# EAGLE board ESPSwitchBoard (EAGLE 7.3.0)
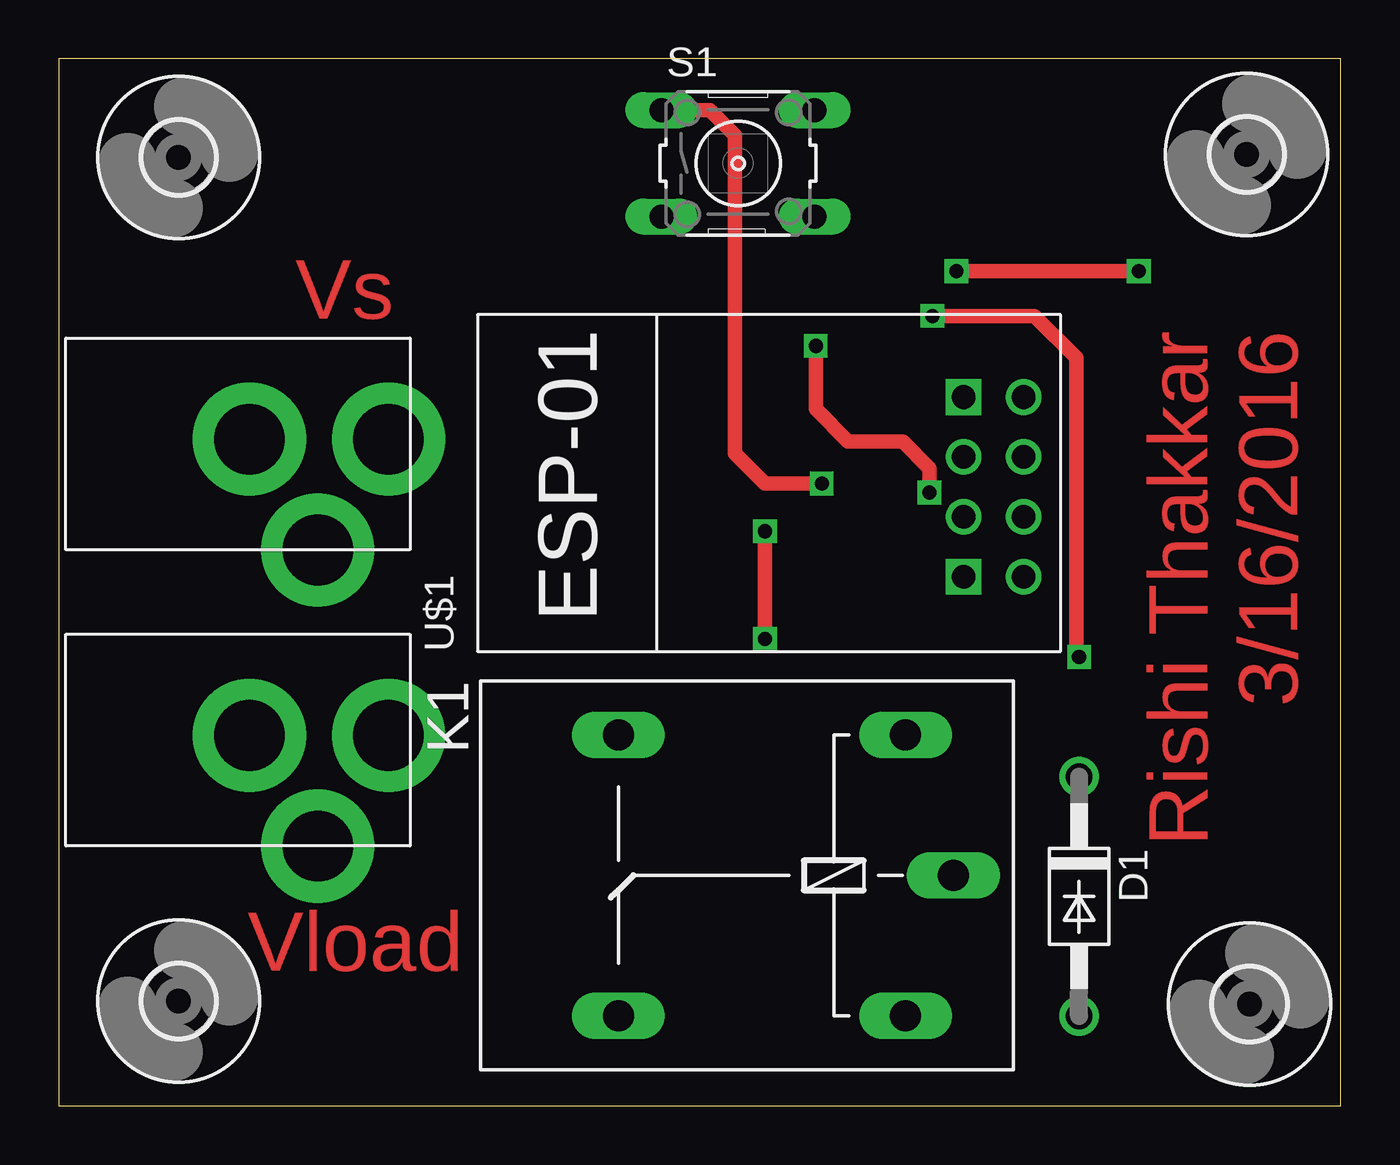
[diagram p0: board, top side]
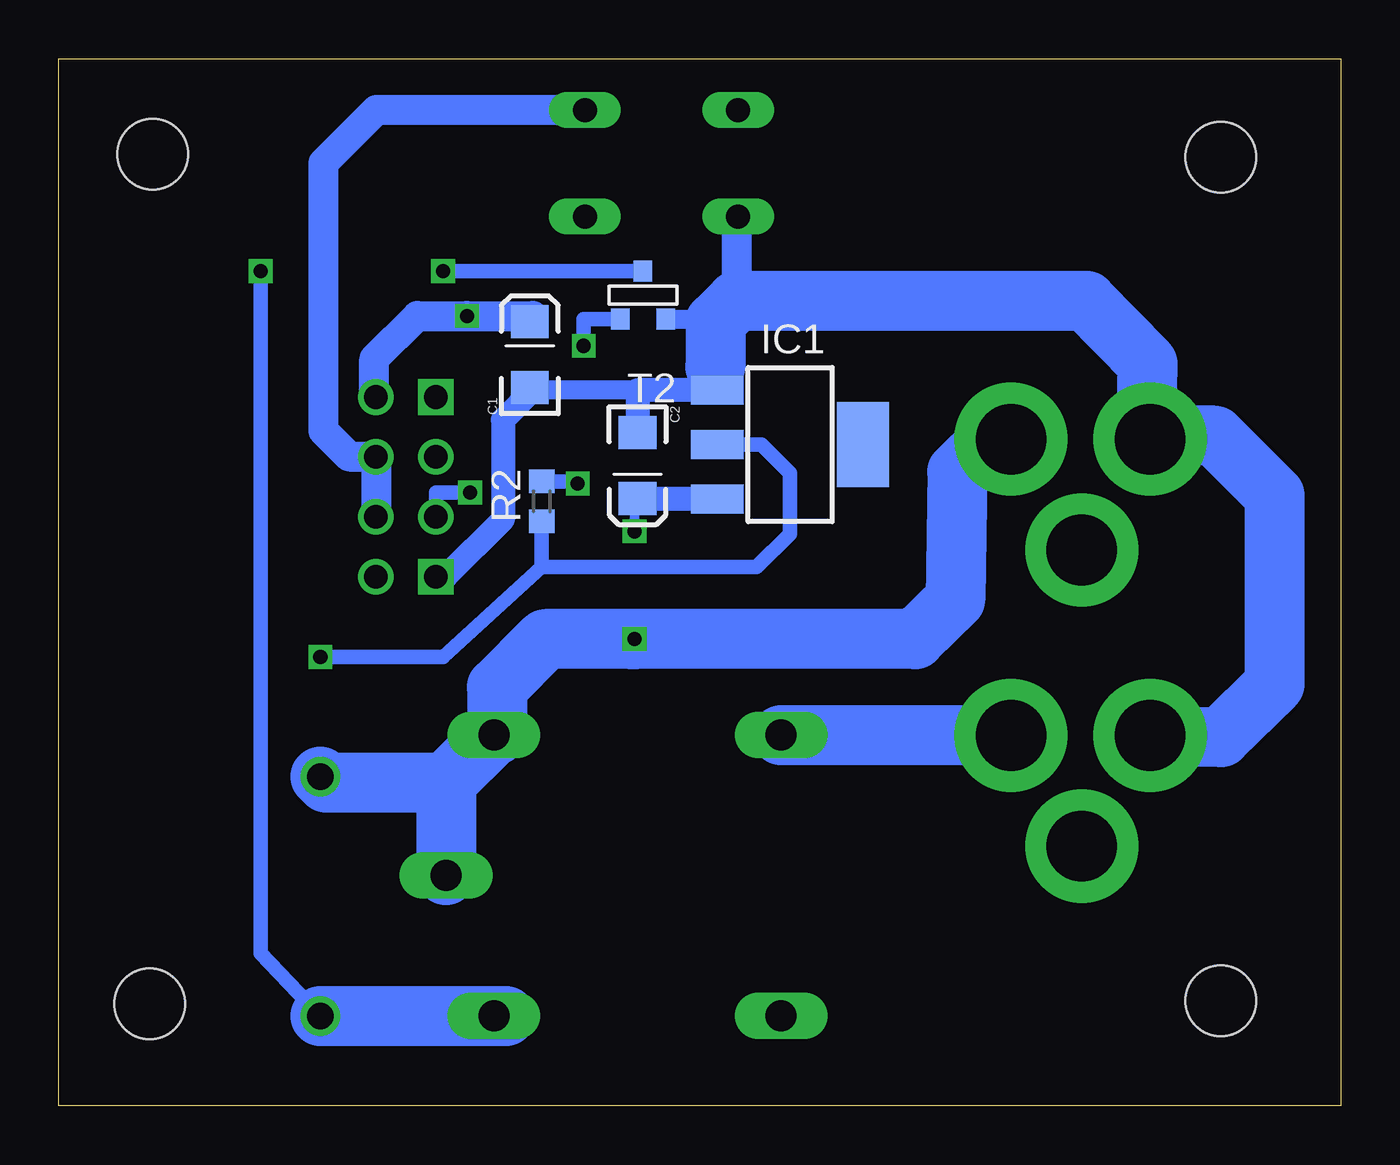
[diagram p1: board, bottom side, seen from below]

Size 54.41 x 44.44 mm. Coordinates in mm from the lower left corner, seen from the top.
Outline: 0,0 54.41,0 54.41,44.44 0,44.44 0,0
Copper layers (1*16): Top 0.035mm / dielectric 1.5mm / Bottom 0.035mm
Design rules "default": minimum track width 10mil, minimum drill 24mil, track to track 8mil, track to pad 8mil, pad to pad 8mil, via to via 8mil, smd to smd 8mil, copper to edge 40mil, drill to drill 8mil, minimum pad ring 10mil, minimum via ring 8mil, stop-mask expansion 4mil, vias tented up to drill 0mil, thermal gap 10mil

## Footprints (pad centres in the part's own frame; a part is rotated, then mirrored left to right if it is on the bottom)
EIA3216 = smd 1.4 x 1.6: A 1.4,0; C -1.4,0
DO41-10 = drill 1.118: A 5.08,0; C -5.08,0
SOT223 = smd 1.219 x 2.235: 1 -2.311,-3.099; 2 0,-3.099; 3 2.311,-3.099 | smd 3.6 x 2.2: TAB 0,3.099
G5LE = drill 1.321 long: 1 -7.493,-5.969; 2 -7.493,5.969; O 4.699,5.969; P -9.525,0; S 4.699,-5.969
R0603 = smd 1 x 1.1: 1 -0.85,0; 2 0.85,0
B3F-10XX = drill 1.016 long: 1 -3.251,2.261; 2 3.251,2.261; 3 -3.251,-2.261; 4 3.251,-2.261
SOT-23 = smd 0.787 x 0.889: 1 0.025,-1.016; 2 -0.94,1.016; 3 0.991,1.016
ESP01 = drill 1: CH_PD -1.285,-8.178; GPIO0 1.255,-5.638; GPIO2 -1.285,-5.638; RST 1.255,-8.178; TX -3.825,-8.178; VCC 3.795,-8.178 | drill 1 square: GND -3.825,-5.638; RX 3.795,-5.638
3,0 = hole 3: 0,0
PJ-102A = drill 3 pad 4.8: RING 0.1,-3.39; RING_SW -4.6,-6.29; TIP 0.1,-9.29

## Placement (x,y rotation side)
C1  10uF  [EIA3216]  34.42,31.88 90 bottom
C2  10uF  [EIA3216]  29.84,27.18 270 bottom
D1  1N4004  [DO41-10]  43.31,8.89 270 top
IC1  LM1117IMPX-3.3  [SOT223]  23.37,28.07 270 bottom
K1  G5LE  [G5LE]  28.45,9.78 180 top
R2  10 KΩ  [R0603]  33.91,25.65 90 bottom
S1  [B3F-10XX]  28.83,40.01 0 top
T2  [SOT-23]  29.59,34.42 180 bottom
U$1  ESP01  [ESP01]  32.77,26.29 90 top
U$2  [3,0]  5.08,40.26 0 top
U$3  [3,0]  50.42,40.39 0 top
U$4  [3,0]  5.08,4.45 0 top
U$5  [3,0]  50.55,4.32 0 top
V_LOAD  2.1MMJACKTHM  [PJ-102A]  4.7,15.62 90 top
V_SOURCE  2.1MMJACKTHM  [PJ-102A]  4.7,28.19 90 top

## Library data of the parts
C1 C2 = SparkFun-Retired; PROD_ID: CAP-00811
D1 = diode
IC1 = lm1117
K1 = relay; OC_FARNELL: unknown; OC_NEWARK: unknown
R2 V_LOAD V_SOURCE = adafruit
S1 = switch-omron; MPN: B3F-1000; OC_FARNELL: 176432; OC_NEWARK: 36M3542
T2 = zetex; OC_FARNELL: unknown; OC_NEWARK: unknown
U$1 = esp8266modules
U$2-U$5 = holes

## Nets
N$1: C2.A D1.C IC1.3 K1.1 K1.P V_SOURCE.TIP
N$2: C1.C C2.C IC1.1 S1.3 T2.2 U$1.GND V_LOAD.RING V_SOURCE.RING
N$3: C1.A IC1.2 R2.1 U$1.VCC
N$4: K1.S V_LOAD.TIP
N$5: D1.A K1.2 T2.1
N$6: R2.2 S1.1
N$7: T2.3 U$1.GPIO2
N$9: S1.2 U$1.CH_PD U$1.RST

## Tracks (layer width: path | path; a pad name or v marks a point on that pad's centre or on a via)
N$1  (via drill 0.6)
  Top 0.61: v29.97,24.38 v29.97,19.81
  Bottom 0.406: C2.A 29.97,25.78 v29.97,24.38
  Bottom 0.61: 26.47,25.78 IC1.3
  Bottom 1.016: C2.A 26.47,25.78
  Bottom 1.778: V_SOURCE.TIP 13.99,28.19
  Bottom 2.54: 13.99,28.19 14.98,28.19 16.28,26.92 16.36,21.49 18.06,19.81 v29.97,19.81 30.1,19.81 33.77,19.81 35.81,17.76 35.81,15.75 K1.1 37.97,13.72 | 37.97,13.72 K1.P | D1.C 43.05,13.72 37.97,13.72
N$2
  Bottom 0.254: 26.54,31.37 26.47,30.61 IC1.1
  Bottom 0.61: 26.54,33.4 26.54,33.27
  Bottom 0.813: T2.2 26.54,33.4 | 29.84,30.38 34.29,30.38 C1.C
  Bottom 1.016: IC1.1 29.84,30.38 C2.C | 34.29,30.38 35.56,29.11 35.56,24.89 37.99,22.46 U$1.GND
  Bottom 1.27: S1.3 25.65,37.74 25.65,34.16
  Bottom 1.778: 8.26,28.29 V_SOURCE.RING 8.09,28.45
  Bottom 2.54: 8.26,28.29 8.19,31.5 10.79,34.16 25.65,34.16 26.54,33.27 26.54,31.37 | V_LOAD.RING 5.08,15.65 2.79,17.88 2.79,25.91 5.34,28.45 8.09,28.45
N$3  (via drill 0.6)
  Top 0.406: v43.31,19.05 43.18,19.05
  Top 0.61: 43.18,19.05 43.18,31.76 41.42,33.53 v37.08,33.53
  Bottom 0.406: 33.91,22.86 33.91,22.73
  Bottom 0.61: IC1.2 24.57,28.07 23.37,26.86 23.37,24.28 24.79,22.86 33.91,22.86 | 33.91,22.86 R2.1 | 33.91,22.86 38.1,19.05 v43.31,19.05
  Bottom 1.27: U$1.VCC 41.02,30.08 41.02,31.7 39.19,33.53 v37.08,33.53 34.29,33.53 C1.A
N$4
  Bottom 0.813: 23.75,15.72 K1.S
  Bottom 2.54: V_LOAD.TIP 23.75,15.72
N$5  (via drill 0.6)
  Top 0.61: v45.85,35.43 v38.1,35.43
  Bottom 0.406: 35.43,3.81 35.69,3.81 | D1.A 43.31,3.94 43.44,3.94
  Bottom 0.61: v38.1,35.43 T2.1 | 43.44,3.94 45.85,6.47 v45.85,35.43
  Bottom 2.54: D1.A K1.2 35.43,3.81
N$6  (via drill 0.6)
  Top 0.61: S1.1 27.63,42.27 28.7,41.19 28.7,27.69 29.97,26.42 v32.38,26.42
  Bottom 0.406: v32.38,26.42 32.38,26.5
  Bottom 0.61: 32.38,26.5 R2.2
N$7  (via drill 0.6)
  Top 0.61: v32.13,32.26 32.13,29.57 33.5,28.19 35.82,28.19 36.96,27.06 v36.96,26.04
  Bottom 0.61: T2.3 32.13,33.4 v32.13,32.26 | v36.96,26.04 38.4,26.04 U$1.GPIO2
N$9
  Bottom 1.27: S1.2 40.93,42.27 43.18,40.02 43.18,28.65 42.09,27.56 40.94,27.56 U$1.RST U$1.CH_PD

## Text on the board
Top: Vs | Rishi Thakkar / 3/16/2016 | Vload